# Altium PCB MCU_PCB_v2.PcbDoc (part 1 of 2)
Units mil, origin at the board's own origin, x right, y up, seen from the top; angles counter-clockwise.
Board outline 1770 x 325 mil, 4 copper layers (Top Layer, Layer 1, Layer 2, Bottom Layer), stack 31.384 mil thick; 67 components, 55 nets, 243 pads, 130 vias.
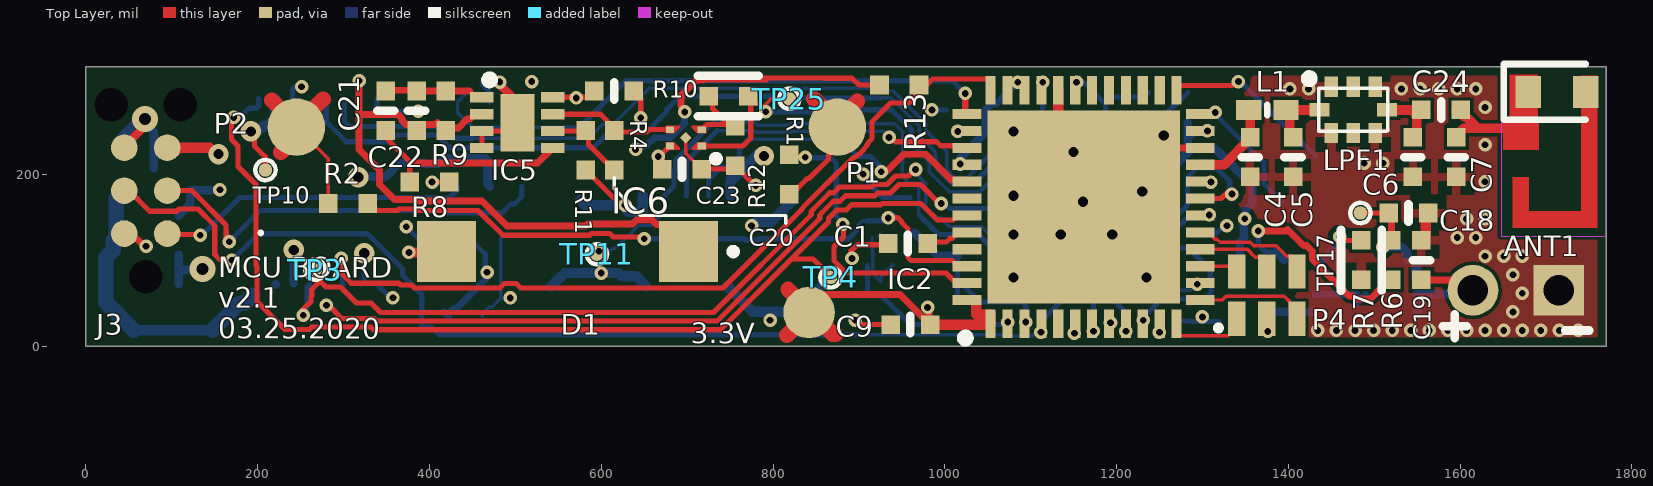
[diagram p0: Top Layer view]
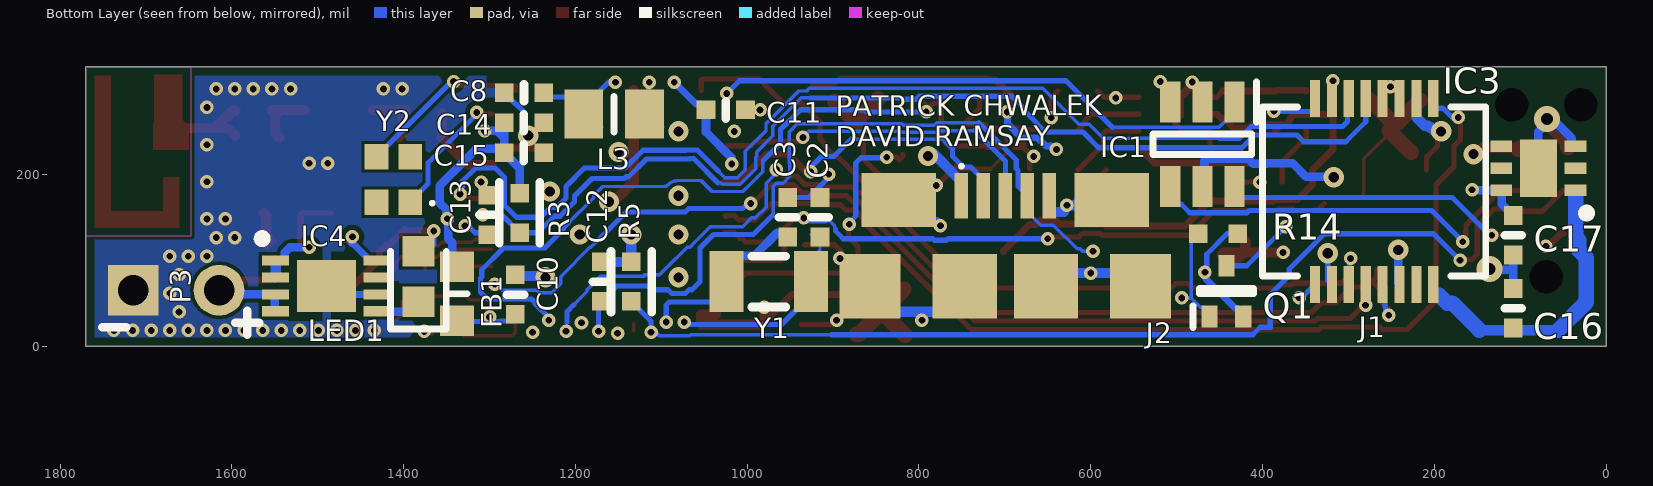
[diagram p1: Bottom Layer view, seen from below]
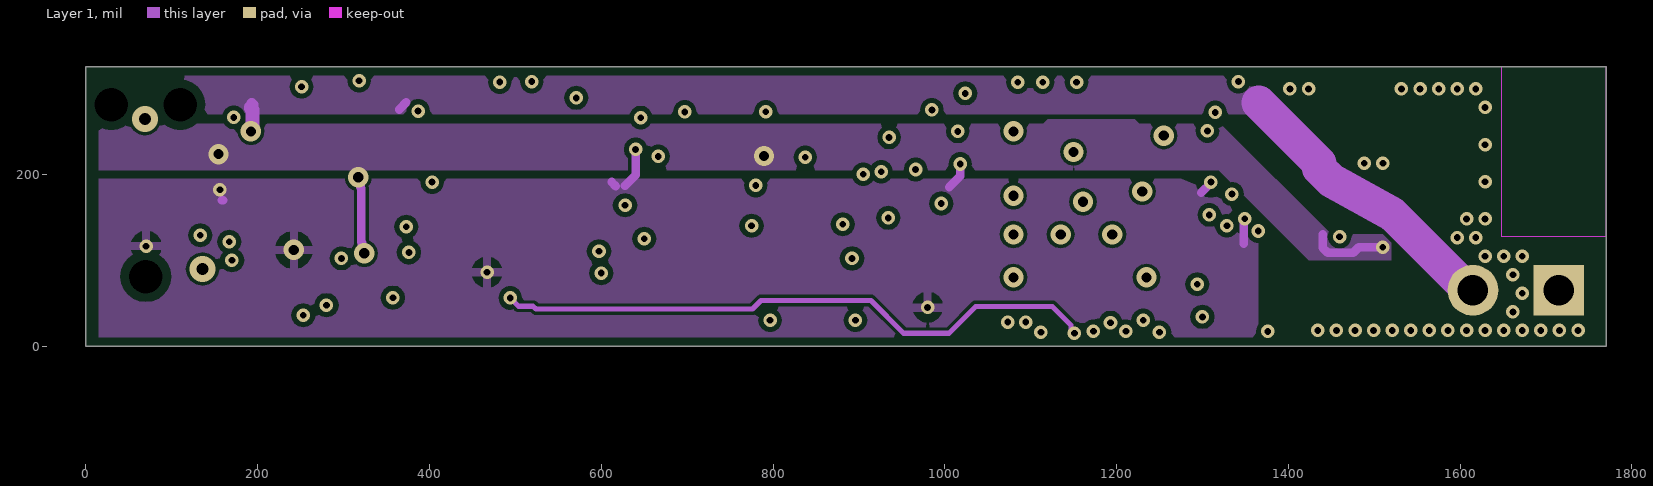
[diagram p2: Layer 1]
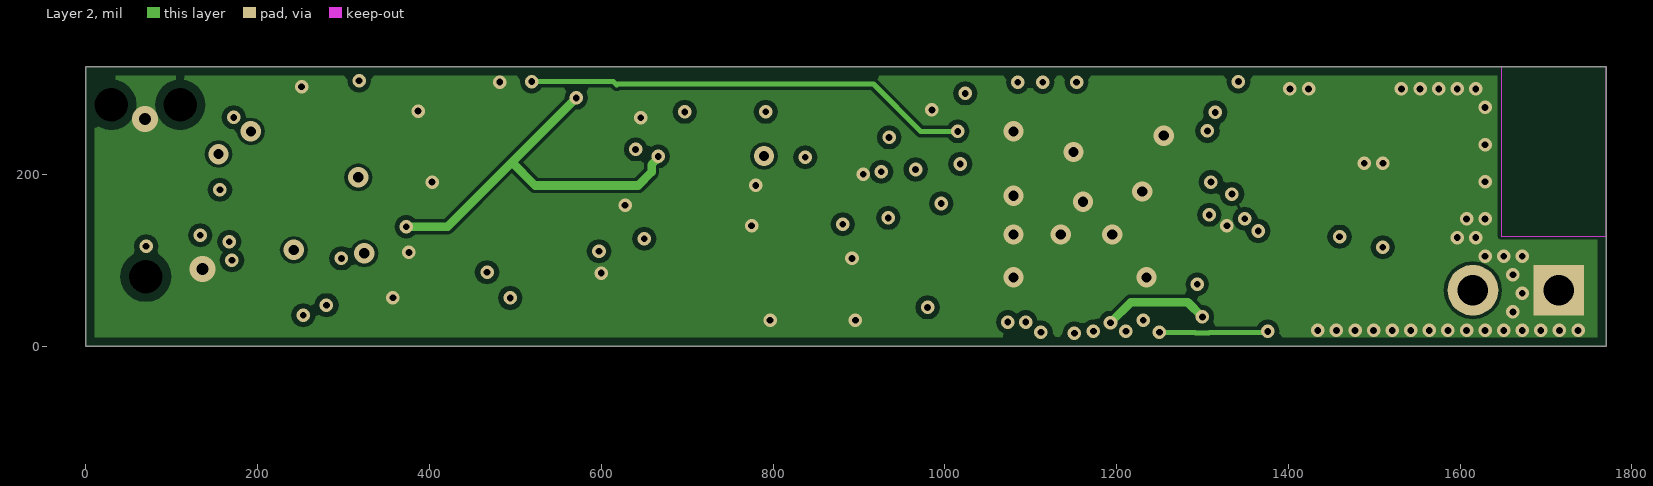
[diagram p3: Layer 2]
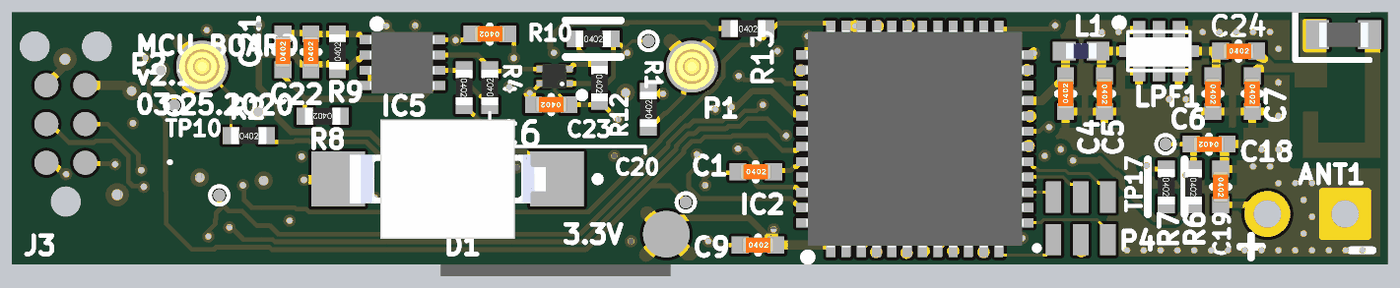
[diagram p4: 3D render of the assembled board from above, using the file's embedded part models]
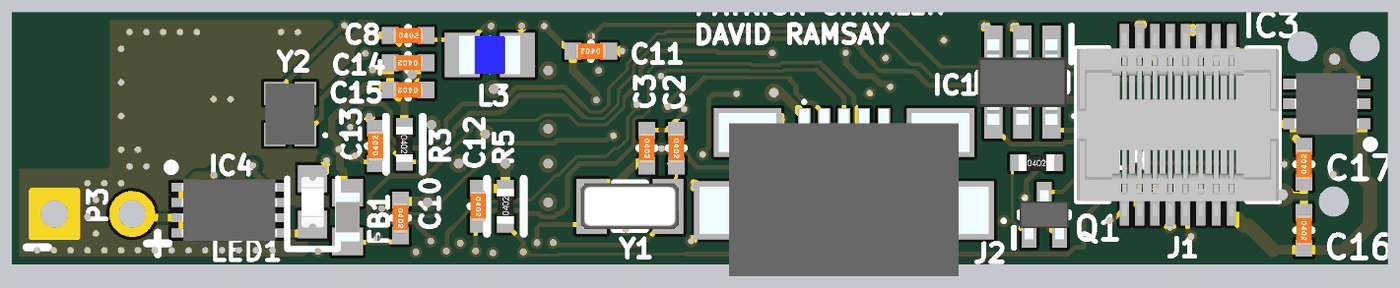
[diagram p5: 3D render of the assembled board from below, using the file's embedded part models]

## Layer stack, top to bottom
Top Solder: solder mask 0.4, Solder Resist, Dk 3.5
Top Layer: signal copper 1.4
Dielectric 2: prepreg 6.6142, PP-006, Dk 4.1
Layer 1: signal copper 1.3778
Dielectric 1: dielectric 12.6, FR-4, Dk 4.8
Layer 2: signal copper 1.3778
Dielectric 3: prepreg 6.6142, PP-006, Dk 4.1
Bottom Layer: signal copper 1.4
Bottom Solder: solder mask 0.4, Solder Resist, Dk 3.5

## Board outline
0,0 1770,0 1770,325 0,325

## Design rules (kind name [scope] priority, off if disabled: settings)
AssemblyTestpoint [(IsPad And (OnTopLayer Or OnBottomLayer)) Or (IsVia) Or (IsPad And OnMultiLayer)] p1: testpointundercomponent=TRUE minsize=19.68 maxsize=100 preferedsize=39.37 minholesize=0 maxholesize=40 preferedholesize=32 testpointgrid=1 usegrid=FALSE gridtolerance=0.01 allowsidetop=TRUE
BoardOutlineClearance [All] p1: gap=9.84 ignorepadtopadclearanceinfootprint=FALSE
Clearance [All] p1: gap=4 ignorepadtopadclearanceinfootprint=FALSE except(9.84: Arc-Hole Track-Hole SMDPad-Hole THPad-Hole Via-Hole Fill-Hole Poly-Hole Region-Hole Text-Hole)
PolygonConnect NO_THERMAL [InNet('GND')    or InNet('5V')] p1: thpad.connectstyle=Direct thpad.reliefconductorwidth=10 thpad.reliefentries=4 thpad.polygonreliefangle="90 Angle" thpad.airgapwidth=10 smdpad.connectstyle=Relief smdpad.reliefconductorwidth=10 smdpad.reliefentries=4 smdpad.polygonreliefangle="90 Angle" smdpad.airgapwidth=10 via.connectstyle=Direct via.reliefconductorwidth=10 via.reliefentries=4 via.polygonreliefangle="90 Angle" via.airgapwidth=10
PolygonConnect [All] p2: connectstyle=Relief reliefconductorwidth=10 reliefentries=4 polygonreliefangle="90 Angle" airgapwidth=10
RoutingVias PWR_Vias [InNet('3.3V') or InNet('5V') or InNet('VBAT') or InNet('VBAT_RAW') or InNet('3.3V_MCU')       or InNet('VBAT_1')] p1: holewidth=11.81 width=23.62 viastyle="Through Hole" minholewidth=5.91 minwidth=11.81 maxholewidth=28 maxwidth=50
RoutingVias [All] p2: holewidth=7.87 width=15.75 viastyle="Through Hole" minholewidth=7.87 minwidth=15.75 maxholewidth=13.94 maxwidth=30
SolderMaskExpansion [All] p1: expansion=4 istentingtop=FALSE
Width RF [InNet('RF_OUT') or InNet('NetC5_2') or InNet('NetC6_2') or InNet('NetANT1_1')] p1: maxlimit=18 minlimit=6 preferedwidth=12 midlayer1_minwidth=10 midlayer1_maxwidth=10 midlayer1_prefwidth=10 midlayer2_minwidth=10 midlayer2_maxwidth=10 midlayer2_prefwidth=10 minimp=50.000000 maximp=50.000000 favimp=50.000000
Width PWR [InNet('3.3V') or InNet('5V') or InNet('VBAT') or InNet('VBAT_1') or InNet('GND')   or InNet('VBAT_MUX')] p2: maxlimit=40 minlimit=6 preferedwidth=18 toplayer_maxwidth=18 toplayer_prefwidth=12 midlayer1_minwidth=10 midlayer2_minwidth=10 midlayer2_maxwidth=10 midlayer2_prefwidth=10 bottomlayer_maxwidth=18 bottomlayer_prefwidth=12 minimp=50.000000 maximp=50.000000 favimp=50.000000
Width [All] p3: maxlimit=10 minlimit=4 preferedwidth=10 toplayer_maxwidth=8 toplayer_prefwidth=6 midlayer1_minwidth=10 midlayer2_minwidth=10 bottomlayer_prefwidth=6 minimp=50.000000 maximp=50.000000 favimp=50.000000
29 further rules are at their usual default settings.

## Classes and differential pairs
component class Sch_sensors: C20 C21 C22 C23 D1 IC5 IC6 Q1 R4 R8 R9 R10 R11 R12 R14 TP25
component class Sch_pwr: C16 C17 C18 C19 IC3 IC4 LED1 P3 R6 R7
component class Sch_mcu: ANT1 C2 C3 C4 C5 C6 C7 C8 C9 C10 C11 C12 C13 C14 C15 C24 FB1 IC2 L1 L3 LPF1 R3 R5 R13 Y1 Y2
component class Sch_external_connectors: C1 IC1 J2 J3 P1 P2 P4 R1 R2 TP3 TP4 TP10 TP11 TP17

## Components (designator, comment, footprint, x,y, rotation, side; value= is the part's Value field where it differs from the comment)
ANT1 "2450AT14A0100T" ANTC1608X40N 1713,296 r0 top
C1 "0.10µF" SMD-0402C 957,119.45 r270 top
C2 "15pF" SMD-0402C 915.25,150 r0 bottom
C3 "15pF" SMD-0402C 953,150 r0 bottom
C4 "0.80pF" SMD-0402C 1355.63,220 r0 top
C5 "0.30pF" SMD-0402C 1405.63,220 r180 top
C6 "0.80pF" SMD-0402C 1545,220 r180 top
C7 "0.30pF" SMD-0402C 1595.63,220 r180 top
C8 "4.7µF" SMD-0402C 1260,295 r270 bottom
C9 "0.10µF" SMD-0402C 960,25 r270 top
C10 "0.10µF" SMD-0402C 1270,60 r0 bottom
C11 "0.10µF" SMD-0402C 1025,275 r90 bottom
C12 "0.10µF" SMD-0402C 1170,75 r0 bottom
C13 "0.10µF" SMD-0402C 1302,152.73 r180 bottom
C14 "0.10µF" SMD-0402C 1260,260 r90 bottom
C15 "100pF" SMD-0402C 1260,225 r90 bottom
C16 "1µF" SMD-0402C 108,44 r0 bottom
C17 "1µF" SMD-0402C 108,129 r180 bottom
C18 "4.7µF" SMD-0402C 1540,155 r90 top
C19 "4.7µF" SMD-0402C 1555,100 r180 top
C20 "0.10µF" SMD-0402C 615,297 r90 top
C21 "10000pF" SMD-0402C 349,274 r0 top
C22 "5pF" SMD-0402C 385,274 r0 top
C23 "0.10µF" SMD-0402C 694,206 r90 top
C24 "10pF" SMD-0402C 1578,275 r270 top
D1 "VBPW34FASR" VBPW34FASR 560.75,110 r180 top
FB1 "BLM18KG601SZ1D" BEADC1608X95N 1338,61 r90 bottom
IC1 "USBLC6-2SC6" SOT95P280X145-6N 470,235 r270 bottom
IC2 "STM32WB55CGU6" QFN50P700X700X65-49N-D 1161.73,161.91 r90 top
IC3 "MCP1700T-3302E_MAY" SON65P200X200X90-7N 78.69,207 r0 bottom
IC4 "MCP73831T-2ACI_MC" SON50P300X200X100-9N-D 1490,70 r180 bottom
IC5 "TLV9062IDSGT" SON50P200X200X80-9N 502.34,260.16 r0 top
IC6 "TLV9061IDPWR" X2SON 698.5,242.55 r180 top
J1 "54722-0164" 54722-0164 270,180 r180 bottom
J2 "ZX62-B-5PA(33)" ZX62B5PA33 699.41,98.23 r180 bottom
J3 "TC2030-CTX-NL" TC2030MCPNL10 77.57,181 r90 top
L1 "LQG15HS2N7S02D" INDC1005X55N 1375.63,275 r0 top
L3 "LBR2012T100K" INDC2012X145N 1155,270 r0 bottom
LED1 "SML-E12M8WT86" LEDC1608X46N 1383,81 r90 bottom
LPF1 "LFL212G45TC1A007" LFL212G45TC1A007 1475.63,275 r0 top
P1 "P70-5000045R" P70-5000045R 875,255 r0 top
P2 "P70-5000045R" P70-5000045R 245,255 r0 top
P3 "Header 2" HDR1X2 1715,65 r180 bottom
P4 "Captivates_Breakout" CAPTIVATE_BREAKOUT_PADS 1330,6.83 r0 top
Q1 "RE1C002ZPTL" SOTFL50P160X85-3N 442,64 r90 bottom
R1 "1k" SMD-0402-RES 819,200 r0 top
R2 "1k" SMD-0402-RES 305,166 r270 top
R3 "10k" SMD-0402-RES 1265,155 r0 bottom
R4 "100k" SMD-0402-RES 615,228 r0 top
R5 "100k" SMD-0402-RES 1135,75 r180 bottom
R6 "110" SMD-0402-RES 1520,100 r180 top
R7 "17.4k" SMD-0402-RES 1485,100 r180 top
R8 "47k" SMD-0402-RES 400,191 r90 top
R9 "100k" SMD-0402-RES 419,274 r0 top
R10 "100k" SMD-0402-RES 748,291 r270 top
R11 "3.3k" SMD-0402-RES 582,228 r180 top
R12 "3.3k" SMD-0402-RES 756.1,233.1 r180 top
R13 "10k" SMD-0402-RES 947,304 r270 top
R14 "1M" SMD-0402-RES 452,131 r270 bottom
TP3 "TestPoint" TESTPOINT_0.4MM 267,89 r90 top
TP4 "TestPoint" TESTPOINT_0.4MM 867,80 r90 top
TP10 "TestPoint" TESTPOINT_0.4MM 209,205 r90 top
TP11 "TestPoint" TESTPOINT_0.4MM 595,107 r90 top
TP17 "TestPoint" TESTPOINT_0.4MM 1484,155 r90 top
TP25 "TestPoint" TESTPOINT_0.4MM 819,288 r90 top
Y1 "NX3215SA-32.768K-STD-MUA-8" NX3215SA 975,75 r0 bottom
Y2 "XRCGB32M000F1H01R0" XRCGB32M000F1H01R0 1412,194 r90 bottom

## Footprints (in the part's own frame and the unit in brackets; to place one, negate y for a bottom-side part, rotate by r counter-clockwise, add the part's x,y. Pads: shape width x height; smd on the part's side, far side on the other; paste and mask are expansions set on the pad)
54722-0164 [mm]
  rect 0.3x1.1 smd: 1(-1.75,-2.75) 2(-1.75,2.75) 3(-1.25,-2.75) 4(-1.25,2.75) 5(-0.75,-2.75) 6(-0.75,2.75) 7(-0.25,-2.75) 8(-0.25,2.75) 9(0.25,-2.75) 10(0.25,2.75) 11(0.75,-2.75) 12(0.75,2.75) 13(1.25,-2.75) 14(1.25,2.75) 15(1.75,-2.75) 16(1.75,2.75)
  silkscreen extent -3.3,-2.5 3.3,2.5, body extent -3.3,-3 3.3,3, height 1.18
ANTC1608X40N [mm]
  rect 0.75x0.95 smd: 1(-0.85,0) 2(0.85,0)
  silkscreen extent -1.58,-0.82 0.85,0.82, body extent -0.8,-0.4 0.8,0.4, height 0.4
BEADC1608X95N [mm]
  rect 0.9x1 smd: 1(-0.8,0) 2(0.8,0)
  silkscreen extent 0,-0.3 0,0.3, body extent -0.8,-0.4 0.8,0.4, height 0.95
CAPTIVATE_BREAKOUT_PADS [mil]
  rect 20x40 smd: 1(10,25) 2(45,25) 3(80,25) 4(80,80) 5(45,80) 6(10,80)
  silkscreen extent -13,13 -10,16
HDR1X2 [mm] "Connector; Header; 2 Position"
  rect 1.5x1.5 hole 0.9: 1(0,0)
  round 1.5 hole 0.9: 2(2.54,0)
INDC1005X55N [mm]
  rect 0.75x0.6 smd: 1(-0.55,0) 2(0.55,0)
  silkscreen extent 0,-0.15 0,0.15, body extent -0.5,-0.25 0.5,0.25, height 0.55
INDC2012X145N [mm]
  rect 1.15x1.45 smd: 1(-0.9,0) 2(0.9,0)
  silkscreen extent 0,-0.53 0,0.53, body extent -1,-0.63 1,0.63, height 1.45
LEDC1608X46N [mm]
  rect 0.9x0.95 smd: 1(-0.75,0) 2(0.75,0)
  silkscreen extent -1.55,-0.82 0.75,0.82, body extent -0.84,-0.37 0.81,0.36, height 0.68
LFL212G45TC1A007 [mm]
  rect 0.4x0.6 smd: 1(-0.65,0.685) 2(0,0.685) 3(0.65,0.685) 5(0.65,-0.685) 6(0,-0.685) 7(-0.65,-0.685)
  rect 0.6x0.4 smd: 4(1,0) 8(-1,0)
  silkscreen extent -1.42,-0.64 1.02,1.05, body extent -1,-0.5 1,0.45, height 0.87
NX3215SA [mm]
  rect 1x1.8 smd: 1(-1.25,0) 2(1.25,0)
  silkscreen extent -0.5,-0.75 0.5,0.75, body extent -1.6,-0.75 1.6,0.75, height 0.8
P70-5000045R [mm]
  round 1.7 smd: 1(0,0)
  body extent -0.75,-0.75 0.75,0.75, height 2.4
QFN50P700X700X65-49N-D [mm]
  rect 0.85x0.3 smd: 1(-3.45,2.75) 2(-3.45,2.25) 3(-3.45,1.75) 4(-3.45,1.25) 5(-3.45,0.75) 6(-3.45,0.25) 7(-3.45,-0.25) 8(-3.45,-0.75) 9(-3.45,-1.25) 10(-3.45,-1.75) 11(-3.45,-2.25) 12(-3.45,-2.75) 25(3.45,-2.75) 26(3.45,-2.25) 27(3.45,-1.75) 28(3.45,-1.25) 29(3.45,-0.75) 30(3.45,-0.25) 31(3.45,0.25) 32(3.45,0.75) 33(3.45,1.25) 34(3.45,1.75) 35(3.45,2.25) 36(3.45,2.75)
  rect 0.3x0.85 smd: 13(-2.75,-3.45) 14(-2.25,-3.45) 15(-1.75,-3.45) 16(-1.25,-3.45) 17(-0.75,-3.45) 18(-0.25,-3.45) 19(0.25,-3.45) 20(0.75,-3.45) 21(1.25,-3.45) 22(1.75,-3.45) 23(2.25,-3.45) 24(2.75,-3.45) 37(2.75,3.45) 38(2.25,3.45) 39(1.75,3.45) 40(1.25,3.45) 41(0.75,3.45) 42(0.25,3.45) 43(-0.25,3.45) 44(-0.75,3.45) 45(-1.25,3.45) 46(-1.75,3.45) 47(-2.25,3.45) 48(-2.75,3.45)
  rect 5.7x5.7 smd: 49(0,0)
  silkscreen extent -4,3.37 -3.75,3.62, body extent -3.55,-3.55 3.55,3.55, height 0.65
SMD-0402-RES [mm]
  rect 0.55x0.55 smd: 1(0,0.584) 2(0,-0.584)
  body extent -0.27,-0.57 0.28,0.58, height 0.41
SMD-0402C [mm]
  rect 0.55x0.55 smd: 1(0,0.584) 2(0,-0.584)
  silkscreen extent -0.25,0 0.25,0, body extent -0.25,-0.51 0.25,0.51, height 0.51
SON50P200X200X80-9N [mm]
  rect 0.7x0.3 smd: 1(-1.05,0.75) 2(-1.05,0.25) 3(-1.05,-0.25) 4(-1.05,-0.75) 5(1.05,-0.75) 6(1.05,-0.25) 7(1.05,0.25) 8(1.05,0.75)
  rect 1x1.7 smd: 9(0,0)
  silkscreen extent -0.95,1.14 -0.7,1.39, body extent -1.05,-1 1.05,1, height 0.8
SON50P300X200X100-9N-D [mm]
  rect 0.8x0.3 smd: 1(-1.5,0.75) 2(-1.5,0.25) 3(-1.5,-0.25) 4(-1.5,-0.75) 5(1.5,-0.75) 6(1.5,-0.25) 7(1.5,0.25) 8(1.5,0.75)
  rect 1.75x1.55 smd: 9(0,0)
  silkscreen extent -2.02,1.28 -1.78,1.52, body extent -1.55,-1 1.55,1, height 1
SON65P200X200X90-7N [mm]
  rect 0.65x0.35 smd: 1(-1.1,0.65) 2(-1.1,0) 3(-1.1,-0.65) 4(1.1,-0.65) 5(1.1,0) 6(1.1,0.65)
  rect 1.1x1.7 smd: 7(0,0)
  silkscreen extent -1.55,1.2 -1.3,1.45, body extent -1.05,-1 1.05,1, height 0.9
SOT95P280X145-6N [mm]
  rect 1.2x0.6 smd: 1(-1.25,0.95) 2(-1.25,0) 3(-1.25,-0.95) 4(1.25,-0.95) 5(1.25,0) 6(1.25,0.95)
  silkscreen extent -1.85,-1.46 0.3,1.6, body extent -1.4,-1.46 1.4,1.46, height 1.45
SOTFL50P160X85-3N [mm]
  rect 0.645x0.48 smd: 1(-0.752,0.5) 2(-0.752,-0.5) 3(0.752,0)
  silkscreen extent -1.07,-0.8 0.08,0.99, body extent -0.8,-0.8 0.8,0.8, height 0.85
TC2030MCPNL10 [mm]
  round 0.787 smd: 1(-1.27,-0.434) 2(-1.27,0.836) 3(0,-0.434) 4(0,0.836) 5(1.27,-0.434) 6(1.27,0.836)
  round 0.495 hole 0.991 unplated: 7(-2.54,0.201) 8(2.54,1.217) 9(2.54,-0.815)
  silkscreen extent -1.3,-3.25 -1.2,-3.15
TESTPOINT_0.4MM [mm]
  round 0.4 smd: 1(0,0)
  silkscreen extent -0.3,-0.3 0.3,0.3
VBPW34FASR [mm]
  rect 1.75x1.8 smd: 1(-3.575,0) 2(3.575,0)
  silkscreen extent -5,-0.1 -4.8,0.1, body extent -3.2,-1.95 3.2,1.95, height 1.51
X2SON [mm]
  rect 0.24x0.2 smd mask+0: 1(-0.47,0.24) 2(-0.47,-0.24) 4(0.47,-0.24) 5(0.47,0.24)
  rect 0.25x0.25 smd rot 45: 3(0,0)
  Top Layer region: -0.6,-0.13 -0.6,-0.35 -0.18,-0.35 -0.18,-0.29 -0.34,-0.13
  Top Layer region: 0.6,0.13 0.6,0.35 0.18,0.35 0.18,0.29 0.34,0.13
  Top Layer region: 0.6,-0.13 0.6,-0.35 0.18,-0.35 0.18,-0.29 0.34,-0.13
  Top Layer region: -0.6,0.13 -0.6,0.35 -0.18,0.35 -0.18,0.29 -0.34,0.13
  silkscreen extent -0.97,0.54 -0.81,0.7, body extent -0.39,-0.4 0.41,0.4, height 0.4
XRCGB32M000F1H01R0 [mm]
  rect 0.75x0.7 smd: 1(-0.675,-0.5) 2(0.675,-0.5) 3(0.675,0.5) 4(-0.675,0.5)
  silkscreen extent -0.75,-1.2 -0.65,-1.1, body extent -1,-0.8 1,0.8, height 0.8
ZX62B5PA33 [mm]
  rect 0.4x1.35 smd: 1(-1.3,1.95) 2(-0.65,1.95) 3(0,1.95) 4(0.65,1.95) 5(1.3,1.95)
  rect 2.2x1.6 smd: 6(-3.15,1.825) 7(3.15,1.825)
  rect 1.8x1.9 smd: 8(-4,-0.725) 11(4,-0.725)
  rect 1.9x1.9 smd: 9(-1.2,-0.725) 10(1.2,-0.725)
  silkscreen extent -1.35,2.78 -1.25,2.87, body extent -4.72,-2.88 4.72,2.59, height 2.9

## Part data
ANT1: "Antenna", Manufacturer_Name="JOHANSON TECHNOLOGY", Mouser Part Number=609-2450AT14A0100T, Datasheet Link=https://www.johansontechnology.com/datasheets/2450AT14A0100/2450AT14A0100.pdf, Height=0.4mm, Manufacturer_Part_Number=2450AT14A0100T, Mouser Price/Stock=https://www.mouser.com/Search/Refine.aspx?Keyword=609-2450AT14A0100T
C1 C9 C10 C11 C12 C13 C14 C20 C23: library part GCM155R71C104KA55D, "CAP CER 0.1UF 16V X7R 0402", Digi-Key Part Number=490-4759-1-ND, Manufacturer="Murata Electronics North America", Operating Temperature="-55°C ~ 125°C", Package / Case="0402 (1005 Metric)", Ratings=AEC-Q200, Temperature Coefficient=X7R, Tolerance=±10%, Voltage=16V, @ qty=0, Applications=Automotive, Datasheets=http://www.murata.com/~/media/webrenewal/support/library/catalog/products/capacitor/mlcc/c03e.ashx, Factory Stock=0, Features=-, Height - Seated (Max)=-, Image=//media.digikey.com/Renders/Murata%20Renders/ZRB-SERIES-0402.jpg, Lead Spacing=-, Lead Style=-, Minimum Quantity=1, Mounting Type="Surface Mount, MLCC", Packaging="Cut Tape (CT)", Part Number=GCM155R71C104KA55D, Part Status=Active, Quantity Available=734194, Series=GCM, Size / Dimension="0.039\" L x 0.020\" W (1.00mm x 0.50mm)", Thickness (Max)="0.022\" (0.55mm)", Unit Price (USD)=0.1
C2 C3: library part GCM1555C1H150JA16D, "CAP CER 15PF 50V NP0 0402", Digi-Key Part Number=490-11147-1-ND, Manufacturer="Murata Electronics North America", Operating Temperature="-55°C ~ 125°C", Package / Case="0402 (1005 Metric)", Ratings=AEC-Q200, Temperature Coefficient="C0G, NP0", Tolerance=±5%, Voltage=50V, @ qty=0, Applications=Automotive, Datasheets=http://www.murata.com/~/media/webrenewal/support/library/catalog/products/capacitor/mlcc/c03e.ashx, Factory Stock=0, Features=-, Height - Seated (Max)=-, Image=//media.digikey.com/Renders/Murata%20Renders/ZRB-SERIES-0402.jpg, Lead Spacing=-, Lead Style=-, Minimum Quantity=1, Mounting Type="Surface Mount, MLCC", Packaging="Cut Tape (CT)", Part Number=GCM1555C1H150JA16D, Part Status=Active, Quantity Available=6185, Series=GCM, Size / Dimension="0.039\" L x 0.020\" W (1.00mm x 0.50mm)", Thickness (Max)="0.022\" (0.55mm)", Unit Price (USD)=0.1
C4 C6: library part GRM1555C1HR80BA01D, "CAP CER 0.8PF 50V NP0 0402", Digi-Key Part Number=490-6269-1-ND, Manufacturer="Murata Electronics North America", Operating Temperature="-55°C ~ 125°C", Package / Case="0402 (1005 Metric)", Ratings=-, Temperature Coefficient="C0G, NP0", Tolerance=±0.1pF, Voltage=50V, @ qty=0, Applications="General Purpose", Datasheets=http://www.murata.com/~/media/webrenewal/support/library/catalog/products/capacitor/mlcc/c02e.pdf, Factory Stock=0, Features=-, Height - Seated (Max)=-, Image=//media.digikey.com/Renders/Murata%20Renders/ZRB-SERIES-0402.jpg, Lead Spacing=-, Lead Style=-, Minimum Quantity=1, Mounting Type="Surface Mount, MLCC", Packaging="Cut Tape (CT)", Part Number=GRM1555C1HR80BA01D, Part Status=Active, Quantity Available=38847, Series=GRM, Size / Dimension="0.039\" L x 0.020\" W (1.00mm x 0.50mm)", Thickness (Max)="0.022\" (0.55mm)", Unit Price (USD)=0.1
C5 C7: library part GRM1555C1HR30WA01D, "CAP CER 0.3PF 50V NP0 0402", Digi-Key Part Number=490-6261-1-ND, Manufacturer="Murata Electronics North America", Operating Temperature="-55°C ~ 125°C", Package / Case="0402 (1005 Metric)", Ratings=-, Temperature Coefficient="C0G, NP0", Tolerance=±0.05pF, Voltage=50V, @ qty=0, Applications="General Purpose", Datasheets=http://www.murata.com/~/media/webrenewal/support/library/catalog/products/capacitor/mlcc/c02e.pdf, Factory Stock=0, Features=-, Height - Seated (Max)=-, Image=//media.digikey.com/Renders/Murata%20Renders/ZRB-SERIES-0402.jpg, Lead Spacing=-, Lead Style=-, Minimum Quantity=1, Mounting Type="Surface Mount, MLCC", Packaging="Cut Tape (CT)", Part Number=GRM1555C1HR30WA01D, Part Status=Active, Quantity Available=61475, Series=GRM, Size / Dimension="0.039\" L x 0.020\" W (1.00mm x 0.50mm)", Thickness (Max)="0.022\" (0.55mm)", Unit Price (USD)=0.16
C8 C18 C19: library part GRM153R60G475ME15D, "CAP CER 4.7UF 4V X5R 0402", Digi-Key Part Number=490-13231-1-ND, Manufacturer="Murata Electronics North America", Operating Temperature="-55°C ~ 85°C", Package / Case="0402 (1005 Metric)", Ratings=-, Temperature Coefficient=X5R, Tolerance=±20%, Voltage=4V, @ qty=0, Applications="General Purpose", Datasheets=http://psearch.en.murata.com/capacitor/product/GRM153R60G475ME15%23.pdf, Factory Stock=0, Features=-, Height - Seated (Max)=-, Image=//media.digikey.com/Renders/Murata%20Renders/ZRB-SERIES-0402.jpg, Lead Spacing=-, Lead Style=-, Minimum Quantity=1, Mounting Type="Surface Mount, MLCC", Packaging="Cut Tape (CT)", Part Number=GRM153R60G475ME15D, Part Status=Active, Quantity Available=9100, Series=GRM, Size / Dimension="0.039\" L x 0.020\" W (1.00mm x 0.50mm)", Thickness (Max)="0.013\" (0.33mm)", Unit Price (USD)=0.27
C15: library part GCM1555C1H101JA16D, "CAP CER 100PF 50V NP0 0402", Digi-Key Part Number=490-10669-1-ND, Manufacturer="Murata Electronics North America", Operating Temperature="-55°C ~ 125°C", Package / Case="0402 (1005 Metric)", Ratings=AEC-Q200, Temperature Coefficient="C0G, NP0", Tolerance=±5%, Voltage=50V, @ qty=0, Applications=Automotive, Datasheets=http://www.murata.com/~/media/webrenewal/support/library/catalog/products/capacitor/mlcc/c03e.ashx, Factory Stock=0, Features=-, Height - Seated (Max)=-, Image=//media.digikey.com/Renders/Murata%20Renders/ZRB-SERIES-0402.jpg, Lead Spacing=-, Lead Style=-, Minimum Quantity=1, Mounting Type="Surface Mount, MLCC", Packaging="Cut Tape (CT)", Part Number=GCM1555C1H101JA16D, Part Status=Active, Quantity Available=61397, Series=GCM, Size / Dimension="0.039\" L x 0.020\" W (1.00mm x 0.50mm)", Thickness (Max)="0.022\" (0.55mm)", Unit Price (USD)=0.1
C16 C17: library part GCM155C71A105KE38D, "CAP CER 1UF 10V X7S 0402", Digi-Key Part Number=490-13409-1-ND, Manufacturer="Murata Electronics North America", Operating Temperature="-55°C ~ 125°C", Package / Case="0402 (1005 Metric)", Ratings=AEC-Q200, Temperature Coefficient=X7S, Tolerance=±10%, Voltage=10V, @ qty=0, Applications=Automotive, Datasheets=http://www.murata.com/~/media/webrenewal/support/library/catalog/products/capacitor/mlcc/c03e.ashx, Factory Stock=0, Features=-, Height - Seated (Max)=-, Image=//media.digikey.com/Renders/Murata%20Renders/ZRB-SERIES-0402.jpg, Lead Spacing=-, Lead Style=-, Minimum Quantity=1, Mounting Type="Surface Mount, MLCC", Packaging="Cut Tape (CT)", Part Number=GCM155C71A105KE38D, Part Status=Active, Quantity Available=7240, Series=GCM, Size / Dimension="0.039\" L x 0.020\" W (1.00mm x 0.50mm)", Thickness (Max)="0.022\" (0.55mm)", Unit Price (USD)=0.12
C21: library part GCM155R71H103KA55D, "CAP CER 10000PF 50V X7R 0402", Digi-Key Part Number=490-4762-1-ND, Manufacturer="Murata Electronics North America", Operating Temperature="-55°C ~ 125°C", Package / Case="0402 (1005 Metric)", Ratings=AEC-Q200, Temperature Coefficient=X7R, Tolerance=±10%, Voltage=50V, @ qty=0, Applications=Automotive, Datasheets=http://www.murata.com/~/media/webrenewal/support/library/catalog/products/capacitor/mlcc/c03e.ashx, Factory Stock=0, Features=-, Height - Seated (Max)=-, Image=//media.digikey.com/Renders/Murata%20Renders/ZRB-SERIES-0402.jpg, Lead Spacing=-, Lead Style=-, Minimum Quantity=1, Mounting Type="Surface Mount, MLCC", Packaging="Cut Tape (CT)", Part Number=GCM155R71H103KA55D, Part Status=Active, Quantity Available=650067, Series=GCM, Size / Dimension="0.039\" L x 0.020\" W (1.00mm x 0.50mm)", Thickness (Max)="0.022\" (0.55mm)", Unit Price (USD)=0.1
C22: library part GJM1555C1H5R0BB01D, "CAP CER 5PF 50V NP0 0402", Digi-Key Part Number=490-8103-1-ND, Manufacturer="Murata Electronics North America", Operating Temperature="-55°C ~ 125°C", Package / Case="0402 (1005 Metric)", Ratings=-, Temperature Coefficient="C0G, NP0", Tolerance=±0.1pF, Voltage=50V, @ qty=0, Applications="RF, Microwave, High Frequency", Datasheets=http://www.murata.com/~/media/webrenewal/support/library/catalog/products/capacitor/mlcc/c02e.pdf, Factory Stock=0, Features="High Q, Low Loss", Height - Seated (Max)=-, Image=//media.digikey.com/Renders/Murata%20Renders/ZRB-SERIES-0402.jpg, Lead Spacing=-, Lead Style=-, Minimum Quantity=1, Mounting Type="Surface Mount, MLCC", Packaging="Cut Tape (CT)", Part Number=GJM1555C1H5R0BB01D, Part Status=Active, Quantity Available=17055, Series=GJM, Size / Dimension="0.039\" L x 0.020\" W (1.00mm x 0.50mm)", Thickness (Max)="0.022\" (0.55mm)", Unit Price (USD)=0.2
C24: library part GRM1555C1HR80BA01D, "CAP CER 10PF 50V NP0 0402", Digi-Key Part Number=490-6269-1-ND, Manufacturer="Murata Electronics North America", Operating Temperature="-55°C ~ 125°C", Package / Case="0402 (1005 Metric)", Ratings=-, Temperature Coefficient="C0G, NP0", Tolerance=±0.1pF, Voltage=50V, @ qty=0, Applications="General Purpose", Datasheets=http://www.murata.com/~/media/webrenewal/support/library/catalog/products/capacitor/mlcc/c02e.pdf, Factory Stock=0, Features=-, Height - Seated (Max)=-, Image=//media.digikey.com/Renders/Murata%20Renders/ZRB-SERIES-0402.jpg, Lead Spacing=-, Lead Style=-, Minimum Quantity=1, Mounting Type="Surface Mount, MLCC", Packaging="Cut Tape (CT)", Part Number=GRM1555C1HR80BA01D, Part Status=Active, Quantity Available=38847, Series=GRM, Size / Dimension="0.039\" L x 0.020\" W (1.00mm x 0.50mm)", Thickness (Max)="0.022\" (0.55mm)", Unit Price (USD)=0.1
D1: "Diode", Manufacturer_Name=Vishay, Mouser Part Number=782-VBPW34FASR, RS Part Number=7689401, Datasheet Link=https://www.vishay.com/docs/81127/vbpw34fa.pdf, Height=1.3mm, Manufacturer_Part_Number=VBPW34FASR, Mouser Price/Stock=https://www.mouser.com/Search/Refine.aspx?Keyword=782-VBPW34FASR, RS Price/Stock=https://uk.rs-online.com/web/p/products/7689401
FB1: "Ferrite Bead", Manufacturer_Name="Murata Electronics", Mouser Part Number=81-BLM18KG601SZ1D, Datasheet Link=http://www.murata.com/~/media/webrenewal/support/library/catalog/products/emc/emifil/c31e.ashx?la=en-gb, Height=0.95mm, Manufacturer_Part_Number=BLM18KG601SZ1D, Mouser Price/Stock=https://www.mouser.com/Search/Refine.aspx?Keyword=81-BLM18KG601SZ1D
IC1: "Integrated Circuit", Manufacturer_Name=STMicroelectronics, Mouser Part Number=511-USBLC6-2SC6, RS Part Number=9206266, Allied_Number=70389689, Allied Price/Stock=http://www.alliedelec.com/stmicroelectronics-usblc6-2sc6/70389689/, Datasheet Link=http://www.st.com/st-web-ui/static/active/en/resource/technical/document/datasheet/CD00050750.pdf, Height=1.45mm, Manufacturer_Part_Number=USBLC6-2SC6, Mouser Price/Stock=https://www.mouser.com/Search/Refine.aspx?Keyword=511-USBLC6-2SC6, RS Price/Stock=https://uk.rs-online.com/web/p/products/9206266
IC2: "Integrated Circuit", Manufacturer_Name=STMicroelectronics, Mouser Part Number=511-STM32WB55CGU6, Datasheet Link=https://www.st.com/en/microcontrollers/stm32wb55cg.html, Height=0.65mm, Manufacturer_Part_Number=STM32WB55CGU6, Mouser Price/Stock=https://www.mouser.com/Search/Refine.aspx?Keyword=511-STM32WB55CGU6
IC3: "Integrated Circuit", Manufacturer_Name=Microchip, Manufacturer_Part_Number=MCP1700T-3302E/MAY, Mouser Part Number=579-MCP1700T3302EMAY, Allied_Number=70567878, Allied Price/Stock=https://www.alliedelec.com/microchip-technology-inc-mcp1700t-3302e-may/70567878/, Datasheet Link=http://ww1.microchip.com/downloads/en/DeviceDoc/20001826D.pdf, Height=0.9mm, Mouser Price/Stock=https://www.mouser.com/Search/Refine.aspx?Keyword=579-MCP1700T3302EMAY
IC4: "Integrated Circuit", Manufacturer_Name=Microchip, Manufacturer_Part_Number=MCP73831T-2ACI/MC, Mouser Part Number=579-MCP73831T-2ACIMC, Allied_Number=70452042, Allied Price/Stock=https://www.alliedelec.com/microchiptechnologyinc-mcp73831t-2aci-mc/70452042/, Datasheet Link=http://ww1.microchip.com/downloads/en/DeviceDoc/20001984g.pdf, Height=1mm, Mouser Price/Stock=https://www.mouser.com/Search/Refine.aspx?Keyword=579-MCP73831T-2ACIMC
IC5: "Integrated Circuit", Manufacturer_Name="Texas Instruments", Mouser Part Number=595-TLV9062IDSGT, Datasheet Link=http://www.ti.com/lit/gpn/TLV9062, Height=0.8mm, Manufacturer_Part_Number=TLV9062IDSGT, Mouser Price/Stock=https://www.mouser.com/Search/Refine.aspx?Keyword=595-TLV9062IDSGT
IC6: library part TLV9061DPWR
J1: "Connector", Manufacturer_Name=Molex, Mouser Part Number=538-54722-0164, RS Part Number=7206511, Datasheet Link=http://www.molex.com/webdocs/datasheets/pdf/en-us//0547220164_PCB_RECEPTACLES.pdf, Manufacturer_Part_Number=54722-0164, Mouser Price/Stock=https://www.mouser.com/Search/Refine.aspx?Keyword=538-54722-0164, RS Price/Stock=https://uk.rs-online.com/web/p/products/7206511
J2: "Connector", Manufacturer_Name=Hirose, Mouser Part Number=798-ZX62-B-5PA33, RS Part Number=1362267, Datasheet Link=http://www.mouser.com/ds/2/185/ZX_catalog-939768.pdf, Height=2.8mm, Manufacturer_Part_Number=ZX62-B-5PA(33), Mouser Price/Stock=https://www.mouser.com/Search/Refine.aspx?Keyword=798-ZX62-B-5PA33, RS Price/Stock=http://uk.rs-online.com/web/p/products/1362267
J3: "Connector", Manufacturer_Name="Tag Connect", Datasheet Link=http://www.tag-connect.com/Materials/TC2030-CTX.pdf, Height=18mm, Manufacturer_Part_Number=TC2030-CTX-NL
L1: "Inductor", Manufacturer_Name="Murata Electronics", Datasheet Link=https://www.arrow.com/en/products/lqg15hs2n7s02d/murata-manufacturing, Height=0.55mm, Manufacturer_Part_Number=LQG15HS2N7S02D
L3: "Inductor", Manufacturer_Name="TAIYO YUDEN", Mouser Part Number=963-LBR2012T100K, Datasheet Link=https://componentsearchengine.com/Datasheets/2/LBR2012T100K.pdf, Height=1.45mm, Manufacturer_Part_Number=LBR2012T100K, Mouser Price/Stock=https://www.mouser.com/Search/Refine.aspx?Keyword=963-LBR2012T100K
LED1: "LED", Manufacturer_Name="ROHM Semiconductor", Mouser Part Number=755-SML-E12M8WT86, RS Part Number=6942799, Datasheet Link=https://www.rohm.com/datasheet/SML-E12M8W/sml-e1-e, Height=0.46mm, Manufacturer_Part_Number=SML-E12M8WT86, Mouser Price/Stock=https://www.mouser.com/Search/Refine.aspx?Keyword=755-SML-E12M8WT86, RS Price/Stock=http://uk.rs-online.com/web/p/products/6942799
P3: "Header, 2-Pin", LatestRevisionDate=17-Jul-2002, LatestRevisionNote="Re-released for DXP Platform.", Publisher="Altium Limited"
Q1: "MOSFET (P-Channel)", Manufacturer_Name="ROHM Semiconductor", Mouser Part Number=755-RE1C002ZPTL, RS Part Number=1486960P, Datasheet Link=https://componentsearchengine.com/Datasheets/1/RE1C002ZPTL.pdf, Height=0.85mm, Manufacturer_Part_Number=RE1C002ZPTL, Mouser Price/Stock=https://www.mouser.com/Search/Refine.aspx?Keyword=755-RE1C002ZPTL, RS Price/Stock=http://uk.rs-online.com/web/p/products/1486960P
R1 R2: library part ERJ-2GEJ102X, "RES SMD 1K OHM 5% 1/10W 0402", Digi-Key Part Number=P1.0KJCT-ND, Manufacturer="Panasonic Electronic Components", Operating Temperature="-55°C ~ 155°C", Package / Case="0402 (1005 Metric)", Power (Watts)="0.1W, 1/10W", Supplier Device Package=0402, Temperature Coefficient=±200ppm/°C, Tolerance=±5%, @ qty=1500, Composition="Thick Film", Datasheets=http://industrial.panasonic.com/www-cgi/jvcr13pz.cgi?E+PZ+3+AOA0001+ERJ2GEJ102X+7+WW, Factory Stock=0, Failure Rate=-, Features="Automotive AEC-Q200", Height - Seated (Max)="0.016\" (0.40mm)", Image=//media.digikey.com/Photos/Panasonic%20Photos/ERJ-PA2-Series.jpg, Minimum Quantity=1, Number of Terminations=2, Packaging="Cut Tape (CT)", Part Number=ERJ-2GEJ102X, Part Status=Active, Quantity Available=1939857, Series=ERJ, Size / Dimension="0.039\" L x 0.020\" W (1.00mm x 0.50mm)", Unit Price (USD)=0.00350
R3 R13: library part ERJ-2GEJ103X, "RES SMD 10K OHM 5% 1/10W 0402", Digi-Key Part Number=P10KJCT-ND, Manufacturer="Panasonic Electronic Components", Operating Temperature="-55°C ~ 155°C", Package / Case="0402 (1005 Metric)", Power (Watts)="0.1W, 1/10W", Supplier Device Package=0402, Temperature Coefficient=±200ppm/°C, Tolerance=±5%, @ qty=1500, Composition="Thick Film", Datasheets=http://industrial.panasonic.com/www-cgi/jvcr13pz.cgi?E+PZ+3+AOA0001+ERJ2GEJ103X+7+WW, Factory Stock=0, Failure Rate=-, Features="Automotive AEC-Q200", Height - Seated (Max)="0.016\" (0.40mm)", Image=//media.digikey.com/Photos/Panasonic%20Photos/ERJ-PA2-Series.jpg, Minimum Quantity=1, Number of Terminations=2, Packaging="Cut Tape (CT)", Part Number=ERJ-2GEJ103X, Part Status=Active, Quantity Available=2560215, Series=ERJ, Size / Dimension="0.039\" L x 0.020\" W (1.00mm x 0.50mm)", Unit Price (USD)=0.00350
R4 R5 R9 R10: library part ERJ-2GEJ473X, "RES SMD 100K OHM 5% 1/10W 0402", Digi-Key Part Number=P47KJCT-ND, Manufacturer="Panasonic Electronic Components", Operating Temperature="-55°C ~ 155°C", Package / Case="0402 (1005 Metric)", Power (Watts)="0.1W, 1/10W", Supplier Device Package=0402, Temperature Coefficient=±200ppm/°C, Tolerance=±5%, @ qty=1500, Composition="Thick Film", Datasheets=http://industrial.panasonic.com/www-cgi/jvcr13pz.cgi?E+PZ+3+AOA0001+ERJ2GEJ473X+7+WW, Factory Stock=0, Failure Rate=-, Features="Automotive AEC-Q200", Height - Seated (Max)="0.016\" (0.40mm)", Image=//media.digikey.com/Photos/Panasonic%20Photos/ERJ-PA2-Series.jpg, Minimum Quantity=1, Number of Terminations=2, Packaging="Cut Tape (CT)", Part Number=ERJ-2GEJ473X, Part Status=Active, Quantity Available=5182645, Series=ERJ, Size / Dimension="0.039\" L x 0.020\" W (1.00mm x 0.50mm)", Unit Price (USD)=0.00350
R6: library part ERJ-2RKF8062X, "RES SMD 110 OHM 5% 1/10W 0402", Digi-Key Part Number=P80.6KLCT-ND, Manufacturer="Panasonic Electronic Components", Operating Temperature="-55°C ~ 155°C", Package / Case="0402 (1005 Metric)", Power (Watts)="0.1W, 1/10W", Supplier Device Package=0402, Temperature Coefficient=±100ppm/°C, Tolerance=±5%, @ qty=1500, Composition="Thick Film", Datasheets=http://industrial.panasonic.com/www-cgi/jvcr13pz.cgi?E+PZ+3+AOA0002+ERJ2RKF8062X+7+WW, Factory Stock=0, Failure Rate=-, Features="Automotive AEC-Q200", Height - Seated (Max)="0.016\" (0.40mm)", Image=//media.digikey.com/Photos/Panasonic%20Photos/ERJ-PA2-Series.jpg, Minimum Quantity=1, Number of Terminations=2, Packaging="Cut Tape (CT)", Part Number=ERJ-2RKF8062X, Part Status=Active, Quantity Available=91747, Series=ERJ, Size / Dimension="0.039\" L x 0.020\" W (1.00mm x 0.50mm)", Unit Price (USD)=0.00496
R7: library part ERJ-2GEJ103X, "RES SMD 17.4K OHM 1% 1/10W 0402", Digi-Key Part Number=P10KJCT-ND, Manufacturer="Panasonic Electronic Components", Operating Temperature="-55°C ~ 155°C", Package / Case="0402 (1005 Metric)", Power (Watts)="0.1W, 1/10W", Supplier Device Package=0402, Temperature Coefficient=±200ppm/°C, Tolerance=±1%, @ qty=1500, Composition="Thick Film", Datasheets=http://industrial.panasonic.com/www-cgi/jvcr13pz.cgi?E+PZ+3+AOA0001+ERJ2GEJ103X+7+WW, Factory Stock=0, Failure Rate=-, Features="Automotive AEC-Q200", Height - Seated (Max)="0.016\" (0.40mm)", Image=//media.digikey.com/Photos/Panasonic%20Photos/ERJ-PA2-Series.jpg, Minimum Quantity=1, Number of Terminations=2, Packaging="Cut Tape (CT)", Part Number=ERJ-2GEJ103X, Part Status=Active, Quantity Available=2560215, Series=ERJ, Size / Dimension="0.039\" L x 0.020\" W (1.00mm x 0.50mm)", Unit Price (USD)=0.00350
R8: library part ERJ-2GEJ473X, "RES SMD 47K OHM 5% 1/10W 0402", Digi-Key Part Number=P47KJCT-ND, Manufacturer="Panasonic Electronic Components", Operating Temperature="-55°C ~ 155°C", Package / Case="0402 (1005 Metric)", Power (Watts)="0.1W, 1/10W", Supplier Device Package=0402, Temperature Coefficient=±200ppm/°C, Tolerance=±5%, @ qty=1500, Composition="Thick Film", Datasheets=http://industrial.panasonic.com/www-cgi/jvcr13pz.cgi?E+PZ+3+AOA0001+ERJ2GEJ473X+7+WW, Factory Stock=0, Failure Rate=-, Features="Automotive AEC-Q200", Height - Seated (Max)="0.016\" (0.40mm)", Image=//media.digikey.com/Photos/Panasonic%20Photos/ERJ-PA2-Series.jpg, Minimum Quantity=1, Number of Terminations=2, Packaging="Cut Tape (CT)", Part Number=ERJ-2GEJ473X, Part Status=Active, Quantity Available=5182645, Series=ERJ, Size / Dimension="0.039\" L x 0.020\" W (1.00mm x 0.50mm)", Unit Price (USD)=0.00350
R11 R12: library part ERJ-2GEJ332X, "RES SMD 3.3K OHM 5% 1/10W 0402", Digi-Key Part Number=P3.3KJCT-ND, Manufacturer="Panasonic Electronic Components", Operating Temperature="-55°C ~ 155°C", Package / Case="0402 (1005 Metric)", Power (Watts)="0.1W, 1/10W", Supplier Device Package=0402, Temperature Coefficient=±200ppm/°C, Tolerance=±5%, @ qty=1500, Composition="Thick Film", Datasheets=http://industrial.panasonic.com/www-cgi/jvcr13pz.cgi?E+PZ+3+AOA0001+ERJ2GEJ332X+7+WW, Factory Stock=0, Failure Rate=-, Features="Automotive AEC-Q200", Height - Seated (Max)="0.016\" (0.40mm)", Image=//media.digikey.com/Photos/Panasonic%20Photos/ERJ-PA2-Series.jpg, Minimum Quantity=1, Number of Terminations=2, Packaging="Cut Tape (CT)", Part Number=ERJ-2GEJ332X, Part Status=Active, Quantity Available=514266, Series=ERJ, Size / Dimension="0.039\" L x 0.020\" W (1.00mm x 0.50mm)", Unit Price (USD)=0.00350
R14: library part ERJ-2GEJ105X, "RES SMD 1M OHM 5% 1/10W 0402", Digi-Key Part Number=P1.0MJCT-ND, Manufacturer="Panasonic Electronic Components", Operating Temperature="-55°C ~ 155°C", Package / Case="0402 (1005 Metric)", Power (Watts)="0.1W, 1/10W", Supplier Device Package=0402, Temperature Coefficient=±200ppm/°C, Tolerance=±5%, @ qty=1500, Composition="Thick Film", Datasheets=http://industrial.panasonic.com/www-cgi/jvcr13pz.cgi?E+PZ+3+AOA0001+ERJ2GEJ105X+7+WW, Factory Stock=0, Failure Rate=-, Features="Automotive AEC-Q200", Height - Seated (Max)="0.016\" (0.40mm)", Image=//media.digikey.com/Photos/Panasonic%20Photos/ERJ-PA2-Series.jpg, Minimum Quantity=1, Number of Terminations=2, Packaging="Cut Tape (CT)", Part Number=ERJ-2GEJ105X, Part Status=Active, Quantity Available=1082572, Series=ERJ, Size / Dimension="0.039\" L x 0.020\" W (1.00mm x 0.50mm)", Unit Price (USD)=0.00350
Y1: "Crystal or Oscillator", Manufacturer_Name=NDK, Mouser Part Number=344-NX3215SA32768K8, Datasheet Link=http://www.ndk.com/images/products/catalog/c_NX3215SA-STD-MUA-14_e.pdf, Manufacturer_Part_Number=NX3215SA-32.768K-STD-MUA-8, Mouser Price/Stock=https://www.mouser.com/Search/Refine.aspx?Keyword=344-NX3215SA32768K8
Y2: "Crystal or Oscillator", Manufacturer_Name="Murata Electronics", Mouser Part Number=81-XRCGB32M000F1H01R, Datasheet Link=https://www.murata.com/en-eu/products/productdetail?partno=XRCGB32M000F1H01R0, Height=0.7mm, Manufacturer_Part_Number=XRCGB32M000F1H01R0, Mouser Price/Stock=https://www.mouser.com/Search/Refine.aspx?Keyword=81-XRCGB32M000F1H01R

## Free pads (board coordinates)
  round 60 smd: 2(842,39)

## Via types
v1: diameter 15.75, hole 7.87, Top Layer to Bottom Layer, tented both sides, 111 vias
v2: diameter 23.62, hole 11.81, Top Layer to Bottom Layer, tented bottom, 11 vias
v3: diameter 23.62, hole 11.81, Top Layer to Bottom Layer, tented both sides, 6 vias
v4: diameter 30, hole 13.94, Top Layer to Bottom Layer, tented both sides, 2 vias

## Nets (pads, with @x,y where several pads share a name; then routed paths per layer and width w, separated by ;. In a path a pad name is that pad's centre, name@x,y a point inside that pad or via, vN(x,y) a via of type N, cw(c..) or ccw(c..) an arc to the next point about the centre after c; other vN are vias at no path point)
3.3V_LH: C20.1 C23.1 IC5.8 IC6.5 Q1.3 | length 636.9
  Top Layer w6: IC5.8 584.69,289.69 C20.1 ; v1(666.41,220.83) v1@671,220.83 ; C23.1 v1@671,220.83 ; IC6.5 679.2,233.1 678.27,232.17 678.27,231.38 671,224.11 v1@671,220.83
  Layer 2 w10: v1(373,139) 421,139 496,214 ; v1(571,289) 496,214 ; v1(666.41,220.83) 666.41,219.08 658.6,211.27 658.6,202.57 643.03,187 523,187 496,214
  Bottom Layer w6: v1(373,139) 418.39,93.61 Q1.3
3.3V_MCU: C9.1 C11.1 C13.1 C14.1 C15.1 C17.1 FB1.2 IC2.1 IC2.20 IC2.23 IC2.34 IC2.35 IC2.40 IC2.48 IC3.6 J1.11 J3.2 pad.2 Q1.2 R3.2 R13.2 R14.1 | length 1634.5
  Top Layer w6: 792.09,311.91 792,312 860,312 860.09,311.91 892.09,311.91 900,304 R13.2
  Top Layer w8: J3.2@50,131 52.66,131 67.34,116.32 v1(70,116.32) ; v1(697.33,272.67) 697.33,274.77 692.72,279.38 692.72,291.68 710.86,309.83 719.17,309.83 720.51,311.16 792,311.16 ; pad.2@844.45,39 pad.2 840.69,40.31 840.69,43.42 842,42.11 842,42 860,60 948,60 C9.1@981.5,26.5 ; v1(980,45) 981.5,43.5 C9.1@981.5,26.5 ; C9.1 C9.1@981.5,26.5
  Top Layer w12: C9.1 1053.37,25 1053.46,25.09 IC2.1 1053.46,36.72 1053.37,36.81 1036.54,36.81 1036.54,53.64 IC2.48
  Top Layer w18: 816,12.45 pad.2@841.16,37.61 ; 817.45,66 pad.2@842.61,40.84 ; pad.2@844.45,39 869.61,13.84 873,13.84
  Layer 1 w10: 158.32,170 160,170 ; 612,191 617,186 ; 627.71,186.6 640,198.89 v1(640,229) ; 1005,185 1018,198 v1(1018,212) ; 1298.53,178.53 v1@1310,190 ; 1348,119 1348,137.06 1348.13,137.19 1348.13,140.99 1348.23,141.1 1348.23,147.16 v1(1349.33,148.26)
  Bottom Layer w4: J1.11 J1.11@242,73.26
  Bottom Layer w6: R14.1 441,131 465,107 465,92.11 465.89,91.22 465.89,87.11 v1(467,86)
  Bottom Layer w8: Q1.2@416.71,40 Q1.2 422.32,37.64 428.76,44.09 432.01,44.09 465.92,78 465.92,84.92 v1(467,86) ; v1(640,229) 642.1,229 645.97,232.87 652.16,232.87 661.83,242.55 680.55,242.55 697,259 697,272.34 v1(697.33,272.67) ; C11.1 1054.83,281.83 1059.54,281.83 v1(1085,307.28)
  Bottom Layer w10: v1(70,116.32) v1@71.56,116.32 ; C17.1 121.38,165.38 121.38,180.79 IC3.6 155.41,181.41 v1(156,182) ; J1.11@242,73.26 v3(242,112) ; v1(1018,212) 1018,219.14 1048,249.14 C11.1 ; R3.2 1265,207 C15.1 ; C14.1 1283,242.5 ; v1(1305.89,250.49) 1290.99,250.49 1283,242.5 ; FB1.2@1337.08,92.78 1343.35,99.05 1343.35,120.26 1348,124.91 1348,146.93 v1(1349.33,148.26) ; v1@1350.28,148.26 1350.28,159 1358.28,167 1358.28,186.72 1315,230 1288,230 C15.1 ; C15.1 1283,242.5
  other v1: 1310,191
5V: C18.1 IC1.5 IC4.1 IC4.2 J1.3 J2.1 J3.5 R6.2 TP17.1 | length 691.8
  Top Layer w6: TP17.1 C18.1
  Top Layer w8: v1(1510,115) 1513.17,118.17 1513.17,116.17 R6.2 1520,152 C18.1
  Top Layer w12: J3.5 143.69,231 151.21,223.48 v3(154.35,223.48)
  Top Layer w18: J3.5@100,231 J3.5@102,229
  Layer 1 w10: v3(317.01,196.51) 319.62,193.9 319.62,184.94 320.72,183.84 320.72,120.67 321.39,119.99 321.39,110.61 v3(324,108) ; 1440,130 1440,114.51 1445.86,108.65 1475.65,108.65 1482,115 v1(1510,115)
  Bottom Layer w6: J1.3 324,76.52 v3(324,108)
  Bottom Layer w10: v3(317.01,196.51) 317.5,197 349,197 365.09,213.09 394.04,213.09 395.01,212.13 410.78,212.13 417.06,218.41 464.59,218.41 467.5,215.5 467.5,188.29 IC1.5 ; v1(1510,115) 1532.45,115 1538.31,109.14 IC4.1@1538.31,100.43
  Bottom Layer w12: J2.1 750.59,193.7 752.46,195.57 754.56,195.57 782.81,223.83 785.13,223.83 788.67,220.29 v3(789.64,221.26) ; IC4.2 IC4.1
BLINK_PWM: IC2.43 J1.16 TP4.1 | length 1243.2
  Top Layer w6: v1(172.06,266.25) v1(172.06,266.25) 174,264.36 169.53,259.89 169.53,259.61 169.32,259.4 169.32,240.6 177.04,232.88 177.04,214.09 176.96,214.01 176.96,209.04 198,188 198,94 199,93 199,52 231.78,19.22 259.95,19.22 262.82,22.09 331.62,22.09 334.72,19 738.97,19 821.47,101.5 ; TP4.1 867,81 846.5,101.5 821.47,101.5 ; IC2.43@1023.56,152.07 1015.08,152.07 1010.01,147 991,147 971.95,166.05 927.18,166.05 925.67,164.54 891.28,164.54 885.31,158.56 874.35,158.56 866.83,151.04 866.83,150.85 864.52,148.54 864.52,144.56 821.47,101.5 ; IC2.43@1024.73,150.89 IC2.43
  Bottom Layer w6: v1(172.06,266.25) 179.08,266.25 189.71,276.88 198.2,276.88 201.1,279.78 J1.16
BLINK_SIG: IC2.9 J1.9 TP3.1 | length 1228.8
  Top Layer w6: v1(253,36) 253,43 261.87,51.87 261.87,57.35 262.91,58.39 262.91,65.91 272.5,75.5 ; TP3.1 267,81 272.5,75.5 ; v1(966.05,205.61) 964.14,203.7 963.41,203.7 957.71,198 942.56,198 932.68,188.13 917.72,188.13 914.72,185.13 877.27,185.13 870.7,178.56 866.07,178.56 846.83,159.32 846.83,159.13 844.52,156.83 844.52,152.84 730.68,39 343,39 332,50 315,50 296.34,68.66 279.34,68.66 272.5,75.5
  Bottom Layer w4: v1(966.05,205.61) 966.05,202.43 969.76,198.72 969.76,197.7 977.83,189.63 977.83,161.86 990.46,149.22 995.02,149.22 1005.24,139 1042.96,139 1064,117.96 1064,117.34 1066.34,115 1069.81,115 1072.62,112.19 1072.95,112.19 1091.69,93.45 1091.78,93.36 cw(c1080,80) 1093.36,91.78 1093.45,91.69 1101.04,84.1 1102.21,82.93 1119.73,82.93 1119.83,82.83 1119.83,81.17 1170.97,81.17 1186.83,65.31 1186.83,63.17 1202,48
  Bottom Layer w6: v1(253,36) 253,38.64 256.66,42.29 256.66,44.71 257.32,45.37 257.32,68.9 J1.9 ; 1202,48 1210,40 1210,27.28
  other v1: 1211,17.28
BOOT0: IC2.4 J3.4 R5.2 | length 1252.8
  Top Layer w6: J3.4@50,181 74,157 105.87,157 108.36,159.49 130.51,159.49 150,140 150,106.66 155.72,100.94 169.06,100.94 v1(170,100)
  Bottom Layer w4: 901.78,13.22 1065.86,13.22 1066.86,12.22 1103.04,12.22 v1@1104.95,14.13
  Bottom Layer w6: v1(170,100) 200.81,130.81 327.79,130.81 368.91,89.7 368.91,82.09 391,60 391,22 402.66,22 411.44,13.22 901.78,13.22 ; v1@1104.95,14.13 1110.13,14.13 v1(1112,16) 1112,29 R5.2
EXPANSION_INT: IC2.19 J1.6 | length 1310.4
  Top Layer w6: IC2.19 1321.75,171.75 1329.59,179.59 1332.14,177.05 v1(1334.44,177.05)
  Bottom Layer w4: 450,242 585.5,242 601.61,258.11 614.11,258.11 655.97,299.97 927.76,299.97 930.73,297 940.24,297 978.17,259.06 978.17,250.89 1002.22,226.85 1002.22,205.46 1011.46,196.22 1026.07,196.22 1033.66,203.81
  Bottom Layer w6: J1.6 301.06,286.73 301.06,261.51 306.8,255.78 413.09,255.78 426.87,242 450,242 ; 1033.66,203.81 1058.14,228.29 1071.39,228.29 1071.68,228 1121.4,228 1142.21,207.19 1189.81,207.19 1211.19,185.81 1211.19,172.21 1222.21,161.19 1228.95,161.19 1240.14,150 1268.55,150 1282.83,164.27 1282.83,196.83 1293.17,207.17 1316.56,207.17 1331.89,191.84 1331.89,185.44 1332.58,184.75 1332.58,178.91 v1(1334.44,177.05)
GND: C1.2 C2.2 C3.2 C4.2 C5.1 C6.1 C7.1 C8.2 C9.2 C10.2 C11.2 C12.2 C13.2 C14.2 C15.2 C16.2 C17.2 C18.2 C19.2 C20.2 C23.2 D1.2 IC1.2 IC2.22 IC2.32 IC2.49 IC3.3 IC3.7 IC4.6 IC4.9 IC5.3 IC5.4 IC5.9 IC6.3 J1.1 J1.2 J1.10 J1.12 J2.5 J2.6 J2.7 J2.8 J2.9 J2.10 J2.11 J3.6 LPF1.1 LPF1.3 LPF1.5 LPF1.7 P3.1 R5.1 R7.1 R8.2 R11.1 R12.1 | length 1946.3
  Top Layer w4: IC6.3 698.5,224.5 C23.2
  Top Layer w6: v1(403,191) R8.2 ; IC5.4@459.48,229.11 IC5.4 IC5.3 492.5,250.32 IC5.9 494.54,267.96 IC5.9@494.54,291.46 ; R11.1 621.25,165.75 625.85,165.75 v1(627.71,163.89) ; C20.2 646,289 v1(646,266) ; C23.2 752,206 R12.1 779.2,187 v1(780,187) ; v1(892,102) 892,108.39 890.39,110 898.39,118 C1.2@933.27,118 ; v1(896,30) 901,25 C9.2
  Top Layer w8: IC2.49@1235,230.81 IC2.22
  Top Layer w10: J3.6@44.66,232.19 v4@64.21,251.74 ; v1@483.72,303.45 483.72,302.28 IC5.9@494.54,291.46
  Top Layer w12: v1(376,109) D1.2@421,109 ; D1.2@429,131 420,122 D1.2 D1.2@421,109 ; IC2.32 1132.2,191.44 IC2.49 ; C19.2@1559.83,118.17 C19.2 1560.03,128.03 1560.03,152.03 C18.2 ; D1.2@421,109 445,109 447,107 435,95 D1.2@421,109
  Top Layer w18: J3.6 J3.6@44.66,232.19 ; v4@64.21,262.14 v4@66.51,264.44
  Bottom Layer w6: J1.12 240.47,299.09 243.38,302 v1(251,302) ; J1.1 354.24,56.39 v1(357.39,56.39) ; J1.2 338.9,275.91 341.8,273 391,273 390.3,273.7 v1(386.7,273.7) ; IC1.2@461.19,304.83 470,296.02 IC1.2 ; v1(905,200) 905,196.25 928.25,173 C3.2@960,173 ; v1(985,275) C11.2 ; v2@1253.92,243.92 1258.37,248.37 1258.37,258.37 1260,260 1260,272.87 1269.13,282 1270,282 C8.2 ; C13.2@1305,132 1317,132 v1@1329.58,144.58
  Bottom Layer w8: IC4.6 IC4.9@1480.16,60.16 ; IC4.9@1480.16,50.16 IC4.9@1490,60
  Bottom Layer w10: IC3.3 36.11,232.59 40,236.48 40,242 62,264 66.07,264 66.51,264.44 66.51,261.65 78.69,249.46 IC3.7 ; C16.2@108,72 108,89 ; C17.2 108,89 ; v4(135.77,89.77) 135,89 108,89
  Bottom Layer w12: J2.11 557.24,85 v1(600,85) 620,85 623.79,81.21 640.64,81.21 J2.10 ; J2.7 581.58,163.89 v1(627.71,163.89) ; 631.16,156.16 646.35,156.16 648.23,158.04 J2.5 ; J2.9 776.34,40 802,40 ; v1(775,140) 779.58,144.58 797.93,144.58 J2.6 ; v1(796.57,30) 797.29,30.72 797.29,35.29 802,40 ; J2.8 856.89,69.43 827.46,40 802,40 ; v2(1135,130) R5.1 C12.2 ; v2(1235,80) 1236.5,81.5 1263.5,81.5 C10.2@1265,83
  other v1: 1434.44,18.16 1456.08,18.16 1477.72,18.16 1499.36,18.16 1521,18.16 1542.64,18.16 1564.28,18.16 1585.92,18.16 1607.56,18.16 1629.2,18.16 1650.84,18.16 1672.48,18.16 1694.12,18.16 1715.76,18.16 1737.4,18.16 1661.66,39.8 1672.48,61.44 1661.66,83.08 1629.2,104.72 1650.84,104.72 1672.48,104.72 1596.74,126.36 1618.38,126.36 1328.58,140 1607.56,148 1629.2,148 1629.2,191.28 1488.54,212.92 1510.18,212.92 1629.2,234.56 1629.2,277.84 1401.98,299.48 1423.62,299.48 1531.82,299.48 1553.46,299.48 1575.1,299.48 1596.74,299.48 1618.38,299.48 481.72,307.45
  other v2: 1080,80 1080,130 1195,130 1161,168 1080,175 1230,180 1150,226 1255,245 1080,250
  other v4: 68.61,264.44
I2C1_SCL: IC2.18 J1.8 R3.1 | length 1235.6
  Top Layer w6: IC2.18 1299.38,153.89 IC2.18@1309.84,153.89
  Bottom Layer w4: 926,289 936.92,289 970.17,255.75 970.17,244.83 989,226 989,221.12 990.05,220.07 990.05,206.32 1008.15,188.22 1029.38,188.22 1031.16,190 1033.99,190
  Bottom Layer w6: J1.8@279.87,288.24 279.87,261.13 303,238 352.09,238 359.86,245.78 408.95,245.78 423.73,231 591,231 609.11,249.11 617.83,249.11 617.95,249.22 652.95,249.22 662.78,259.05 662.78,259.78 676.28,273.28 676.28,275.36 691.89,290.97 799.62,290.97 803.13,287.46 819,287.46 820.54,289 926,289 ; 1033.99,190 1062.28,218.29 1067.25,218.29 1067.53,218 1117.26,218 1138.07,197.19 1140.81,197.19 1142.84,195.16 1180.84,195.16 1189,187 1201.19,174.81 1201.19,168.07 1218.07,151.19 1224.81,151.19 1244,132 R3.1 1285.73,152.73 v1(1307.98,152.73)
I2C1_SDA: IC2.36 J1.5 R13.1 | length 942
  Top Layer w6: v1(297.52,102.06) 298.63,100.95 298.63,96.84 299,96.47 299,83 308.83,73.17 364.34,73.17 366.25,71.27 378.95,71.27 382.65,67.57 481.84,67.57 487.05,72.78 500.95,72.78 506.16,67.57 741.88,67.57 834.52,160.21 834.52,160.97 836.83,163.27 836.83,163.46 861.92,188.56 862.41,188.56 892.24,218.39 ccw(c875,255) 911.61,237.76 915.46,241.62 915.46,261.5 936.97,283 958,283 974.5,299.5 986,311 1052,311 1053.46,309.54 IC2.36
  Bottom Layer w6: v1(297.52,102.06) 298.52,101.06 298.52,72.74 J1.5
IMU_INT: IC2.14 J1.7 | length 1157
  Top Layer w6: v1(280.06,47.66) 282.34,47.66 297.91,32.09 335.76,32.09 338.86,29 734.82,29 854.52,148.7 854.52,152.68 856.83,154.99 856.83,155.18 870.21,168.56 877.95,168.56 884.39,175 918.86,175 921.98,178.13 936.82,178.13 946.7,188 971.75,188 995.16,164.6 995.56,165 v1@997,165
  Bottom Layer w4: 1173,124 1182.17,114.83 1183.31,114.83 1217.19,80.95 1217.19,72.62 1227.62,62.19 1242.38,62.19 1245.36,65.17 1285.78,65.17 1289.47,68.86 1291.58,68.86 v1@1292.22,68.22
  Bottom Layer w6: v1@997,165 1000.44,165 1005.44,160 1068.4,160 1072.21,156.19 1140.81,156.19 1173,124 ; v1@1292.22,68.22 1292.22,73.19 v1@1294.71,70.71
  other v1: 1294,72 996,166
LH_DIODE_ARRAY: C22.2 D1.1 IC5.2 J1.4 R9.2 | length 702.7
  Top Layer w8: v1(318,309) 318,269.83 ; C22.2 C22.2@378.17,257.83 ; R9.2 R9.2@416,254 ; IC5.2 453.13,270 447.35,264.22 443.91,264.22 433.69,254 419,254 R9.2@416,254 ; D1.1 701.5,110.98 671.05,141.43 664.28,141.43 659,146.72 641,146.72 636.46,142.17 584.23,142.17 582.06,140 490,140 461,169 387.85,169 386.14,170.72 359.28,170.72 341.81,188.19 341.81,205.21 318,229.02 318,269.83 ; 318,269.83 363.14,269.83 367.83,265.14 367.83,262.51 372.51,257.83 C22.2@378.17,257.83 ; C22.2@378.17,257.83 406.83,257.83 409.5,260.5 R9.2@416,254
LH_EN: IC2.6 Q1.1 R14.2 | length 828.6
  Layer 1 w6: v1(494,56) 503.69,46.31 520.69,46.31 524,43 775.98,43 785.98,53 914,53 952,15 1005,15 1036,46 1125.08,46 1146.91,24.17 1146.91,16.98 1151,12.88 v1(1151,15)
  Bottom Layer w4: Q1.1 461.68,37.64 469.13,45.09 472.38,45.09 483,55.71 ; R14.2@483,126 483,55.71 ; v1(494,56) 493.71,55.71 483,55.71
LH_INV_AMP_N: IC5.6 R4.2 R11.2 | length 98.3
  Top Layer w6: IC5.6 581.32,250.32 R11.2 585.31,247.69 585.31,234.69 R4.2
LH_SIG: IC2.10 IC6.1 R10.1 TP25.1 | length 922.6
  Top Layer w4: v1@791.67,275.19 791.67,278.33 790,280 798,288 TP25.1
  Top Layer w6: IC6.1 765.1,233.1 774,242 R10.1@774,288 ; R10.1 R10.1@774,288 ; v1(791.67,272.72) 791.67,275.19 791.67,277.46 790,279.13 787.36,279.13 783.32,283.17 778.83,283.17 R10.1@774,288
  Bottom Layer w4: 981.05,216.34 982.05,215.34 982.05,203 996.53,188.53 1005.06,180 1041,180 1053.81,192.81 1080,192.81 cw(c1080,175) 1094.02,185.99 ccw(c1096.9,209.72) 1096.9,185.81 ; 1096.94,185.81 1168.38,185.81 1178.81,175.38 1178.81,172.79 1208.3,143.3 ; v1(1231,30) v1@1231,33
  Bottom Layer w6: v1(791.67,272.72) 860.84,272.72 863.31,275.19 938.01,275.19 961.17,252.02 961.17,236.22 981.05,216.34 ; 1208.3,143.3 1213.81,137.79 1213.81,136.19 1235.83,114.17 1283.83,114.17 1309.19,88.81 1309.19,80.54 1310.78,78.95 1310.78,63.05 1302.56,54.83 1251.27,54.83 1247.17,50.73 1247.17,49.17 v1@1231,33
NetANT1_1: ANT1.1 C7.2 C24.1 | length 121.8
  Top Layer w11.3: C7.2@1596,245.29 1604.26,253.55 1621.19,253.55 ; C24.1@1606.05,268.69 1621.19,253.55 ; 1674.45,253.55 1660.3,253.55 1621.19,253.55
  Top Layer w12: C24.1@1596.28,274 1599.24,274 1605.05,268.19 C24.1@1605.05,267.69 ; 1660.3,257.7 1661,257
  Top Layer w18: 1670.3,257.7 1674.45,253.55
NetC5_2: C5.2 L1.2 LPF1.8 | length 74.4
  Top Layer w11.3: L1.2 LPF1.8 ; C5.2@1401.68,246.95 L1.2@1401.68,270.6